# Altium PCB Interface.PcbDoc
Units mil, origin at the board's own origin, x right, y up, seen from the top; angles counter-clockwise.
Board outline 2450 x 1200 mil, 2 copper layers (Top Layer, Bottom Layer); 16 components, 30 nets, 55 pads, 0 vias.
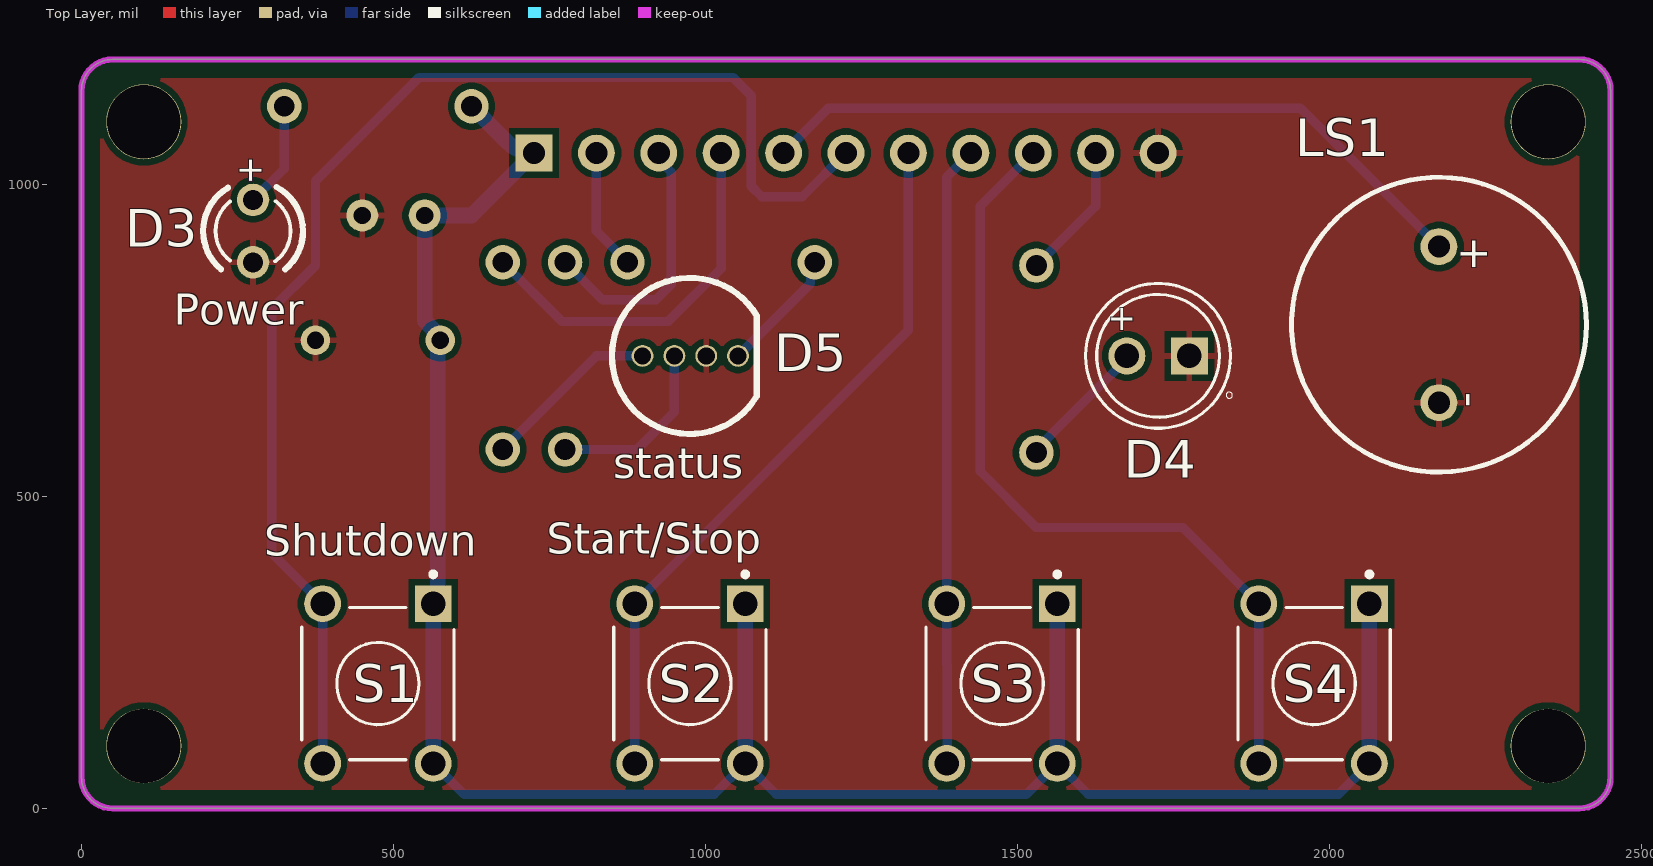
[diagram p0: Top Layer view]
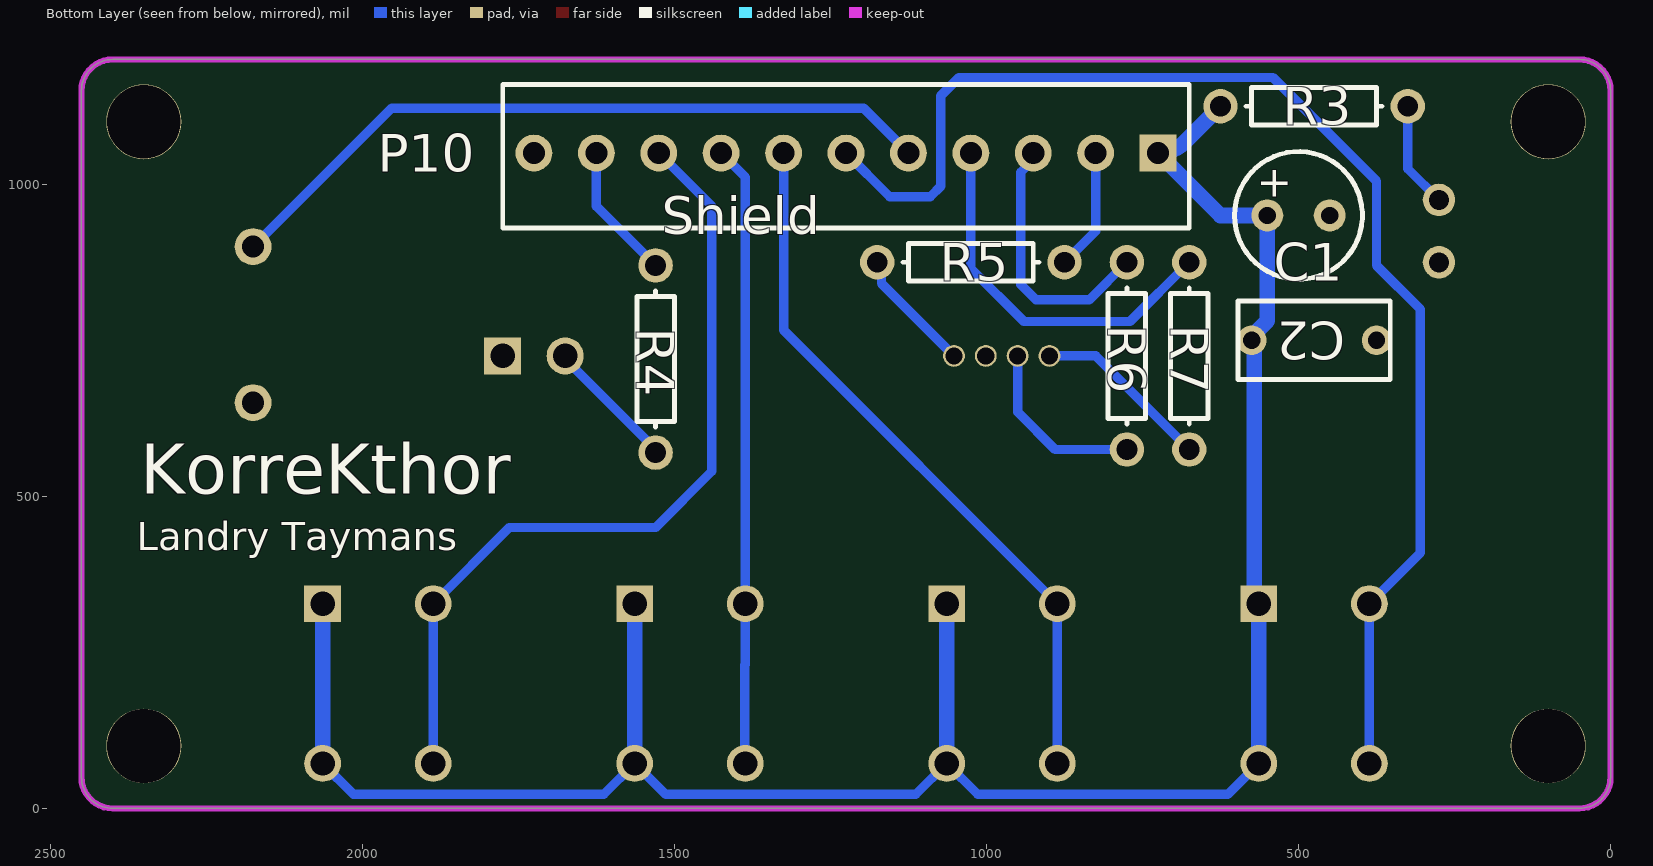
[diagram p1: Bottom Layer view, seen from below]

## Layer stack, top to bottom
Top Solder: solder mask 0.4, Solder Resist, Dk 3.5
Top Layer: signal copper 1.4
Dielectric 1: dielectric 12.6, FR-4, Dk 4.8
Bottom Layer: signal copper 1.4
Bottom Solder: solder mask 0.4, Solder Resist, Dk 3.5

## Board outline
0,50 0,1150 cw(c50,1150) 50,1200 2400,1200 cw(c2400,1150) 2450,1150 2450,50 cw(c2400,50) 2400,0 50,0 cw(c50,50)

## Design rules (kind name [scope] priority, off if disabled: settings)
Clearance [All] p1: gap=10 ignorepadtopadclearanceinfootprint=FALSE except(0: Arc-Hole Track-Hole SMDPad-Hole THPad-Hole Via-Hole Fill-Hole Poly-Hole Region-Hole Text-Hole)
PolygonConnect [All] p1: connectstyle=Relief reliefconductorwidth=10 reliefentries=4 polygonreliefangle="90 Angle" airgapwidth=10
RoutingVias [All] p1: holewidth=28 width=50 viastyle="Through Hole" minholewidth=28 minwidth=50 maxholewidth=28 maxwidth=50
SolderMaskExpansion [All] p1: expansion=4 istentingtop=FALSE
Width [All] p1: maxlimit=50 minlimit=10 preferedwidth=15
30 further rules are at their usual default settings.

## Components (designator, comment, footprint, x,y, rotation, side; value= is the part's Value field where it differs from the comment)
C1 "Cap Pol1" Rad5.2 500,950 r180 bottom value=10u
C2 "Cap" RAD-0.2 475,750 r180 bottom value=100n
D3 "Power" LED_3MM 275,925 r270 top
D4 "LED +" LED_5mm 1725,725 r180 top
D5 "status" "LED RGB" 975,725 r0 top
LS1 "Buzzer" Buzzer 2175,775 r270 top
P10 "Shield" Conn_1X11 725,1050 r0 bottom
R3 "Res1" AXIAL-0.3 475,1125 r180 bottom value=1k
R4 "Res1" AXIAL-0.3 1530,720 r270 bottom value=100
R5 "Res1" AXIAL-0.3 1025,875 r0 bottom value=100
R6 "Res1" AXIAL-0.3 775,725 r270 bottom value=100
R7 "Res1" AXIAL-0.3 675,725 r270 bottom value=100
S1 "Shutdown" SW_1825910-6-4 475,200 r270 top
S2 "Start/Stop" SW_1825910-6-4 975,200 r270 top
S3 "Button +" SW_1825910-6-4 1475,200 r270 top
S4 "Button ++" SW_1825910-6-4 1975,200 r270 top

## Footprints (in the part's own frame and the unit in brackets; to place one, negate y for a bottom-side part, rotate by r counter-clockwise, add the part's x,y. Pads: shape width x height; smd on the part's side, far side on the other; paste and mask are expansions set on the pad)
AXIAL-0.3 [mm] "Axial Device, Thru-Hole; 2 Leads; 0.3 in Pin Spacing"
  round 1.4 hole 0.85: 1(-3.81,0) 2(3.81,0)
  silkscreen extent -2.77,-0.76 2.77,0.76
Buzzer [mm] "Buzzer 10.2 (Dia.)"
  round 1.5 hole 0.9: 1(-3.175,0) 2(3.175,0)
  silkscreen extent -6,-6 6,6
Conn_1X11 [mm] "Connector; Header; 3 Position"
  rect 1.5x1.5 hole 0.9: 1(0,0)
  round 1.5 hole 0.9: 2(2.54,0) 3(5.08,0) 4(7.62,0) 5(10.16,0) 6(12.7,0) 7(15.24,0) 8(17.78,0) 9(20.32,0) 10(22.86,0) 11(25.4,0)
  silkscreen extent -1.27,-2.79 26.67,3.05
"LED RGB" [mil] "5mm RGB LED"
  round 35 hole 27.56: 1(77,0) 2(26,0) 3(-25,0) 4(-76,0)
  silkscreen extent -125,-125 107,125
LED_3MM [mil]
  round 52 hole 32: 1(-50,0) 2(50,0)
  silkscreen extent -71,-80 61,80
LED_5mm [mm]
  round 1.508 hole 1: 1(1.27,0)
  rect 1.508x1.508 hole 1: 2(-1.27,0)
  silkscreen extent -3.03,-2.95 2.95,2.95
Rad5.2 [mm] "Capacitor (Radial); 2 Leads; 5.2 (Dia.)"
  round 1.3 hole 0.7: 1(-1.27,0) 2(1.27,0)
  silkscreen extent -2.6,-2.6 2.6,2.6
RAD-0.2 [mm] "Radial Cap, Thru-Hole; 2 Leads; 0.2 in Pin Spacing"
  round 1.2 hole 0.7: 1(-2.54,0) 2(2.54,0)
  silkscreen extent -3.1,-1.6 3.1,1.6
SW_1825910-6-4 [mm]
  rect 1.498x1.498 hole 0.99: 1(-3.25,2.25)
  round 1.498 hole 0.99: 1(3.25,2.25) 2(-3.25,-2.25) 2(3.25,-2.25)
  silkscreen extent -4.54,-3.1 3.1,3.1

## Part data
C1: "Polarized Capacitor (Radial)", LatestRevisionDate=17-Jul-2002, LatestRevisionNote="Re-released for DXP Platform.", PackageDescription="Polarized Capacitor (Radial); 2 Leads", PackageReference=RB7.6-15, Published=8-Jun-2000, Publisher="Altium Limited"
C2: "Capacitor", LatestRevisionDate=17-Jul-2002, LatestRevisionNote="Re-released for DXP Platform.", PackageDescription="Radial Cap, Thru-Hole; 2 Leads; 0.3 in Pin Spacing", PackageReference=RAD-0.3, Published=8-Jun-2000, Publisher="Altium Limited"
D3 D4: library part LED0, "Typical INFRARED GaAs LED", LatestRevisionDate=08-Jul-2005, LatestRevisionNote="Mech Layer 1 removed.", PackageDescription="LED; 2 Leads", PackageReference=LED-0, Published=8-Jun-2000, Publisher="Altium Limited"
D5: library part LED_RGB, "Typical INFRARED GaAs LED", LatestRevisionDate=08-Jul-2005, LatestRevisionNote="Mech Layer 1 removed.", PackageDescription="LED; 2 Leads", PackageReference=LED-0, Published=8-Jun-2000, Publisher="Altium Limited"
LS1: "Magnetic Transducer Buzzer", ComponentLink1Description="Manufacturer Link", ComponentLink1URL=http://www.megastar.com/linecard/buzzmode/index.php, DatasheetVersion=17-Dec-2003, LatestRevisionDate=17-Dec-2003, LatestRevisionNote="Schematic revised, PCB Footprint replaced.", PackageDescription="Magnetic Transducer Buzzer", PackageReference=ABSM-1574, Published=24-Mar-1999, Publisher="Altium Limited"
P10: library part "Header 11", "Header, 11-Pin", LatestRevisionDate=17-Jul-2002, LatestRevisionNote="Re-released for DXP Platform.", Publisher="Altium Limited"
R3 R4 R5 R6 R7: "Resistor", LatestRevisionDate=17-Jul-2002, LatestRevisionNote="Re-released for DXP Platform.", PackageDescription="Axial Device, Thru-Hole; 2 Leads; 0.3 in Pin Spacing", PackageReference=AXIAL-0.3, Published=8-Jun-2000, Publisher="Altium Limited"
S1 S2 S3 S4: library part SW-PB, "Switch", LatestRevisionDate=17-Jul-2002, LatestRevisionNote="Re-released for DXP Platform.", PackageDescription="Switch; 2 Leads", PackageReference=SPST-2, Published=24-Mar-1999, Publisher="Altium Limited"

## Free pads (board coordinates)
  round 120 hole 118.11: 1(100,100) 1(100,1100) 1(2350,100) 1(2350,1100)

## Nets (pads, with @x,y where several pads share a name; then routed paths per layer and width w, separated by ;. In a path a pad name is that pad's centre, name@x,y a point inside that pad or via, vN(x,y) a via of type N, cw(c..) or ccw(c..) an arc to the next point about the centre after c; other vN are vias at no path point)
+3.3: C1.1 C2.1 P10.1 R3.1 S1.1 S2.1 S3.1 S4.1 | length 3628.8
  Bottom Layer w15: S1.1@563.58,72.05 613.13,22.5 1014.03,22.5 1063.58,72.05 1113.13,22.5 1514.03,22.5 1563.58,72.05 1613.13,22.5 2014.03,22.5 S4.1@2063.58,72.05
  Bottom Layer w25: S1.1@563.58,72.05 563.58,327.95 570.74,335.11 570.74,745.74 C2.1 575,756.02 550,781.02 C1.1 625,950 P10.1 cw(c725,1110.36) 682.32,1067.68 R3.1 ; S2.1@1063.58,72.05 S2.1@1063.58,327.95 ; S3.1@1563.58,72.05 S3.1@1563.58,327.95 ; S4.1@2063.58,72.05 S4.1@2063.58,327.95
+5: 
+24: 
GND: C1.2 C2.2 D3.2 D4.2 D5.2 LS1.2 P10.11
GPIO1: P10.2 R5.1 | length 195.7
  Bottom Layer w15: P10.2 825,925 R5.1
GPIO4: 
GPIO7: P10.3 R6.1 | length 423.8
  Bottom Layer w15: R6.1 835,815 920.61,815 945,839.39 945,1019.19 925,1039.19 P10.3
GPIO8: P10.4 R7.1 | length 609.6
  Bottom Layer w15: R7.1 770,780 940,780 1025,865 P10.4
GPIO12: LS1.1 P10.5 | length 1171.8
  Bottom Layer w15: P10.5 1197.03,1122.03 1952.97,1122.03 LS1.1
GPIO14: P10.6 S1.2 | length 2107.5
  Bottom Layer w15: S1.2@386.42,72.05 386.42,327.95 305,409.37 305,800 375,870 375,1005 541,1171 1044,1171 1073,1142 1073,997 1090,980 1155,980 P10.6
GPIO15: P10.7 S2.2 | length 1159.6
  Bottom Layer w15: S2.2@886.42,72.05 886.42,327.95 1325,766.53 P10.7
GPIO17: 
GPIO18: 
GPIO22: 
GPIO23: P10.8 S3.2 | length 994.4
  Bottom Layer w15: S3.2@1386.42,72.05 1387,72.63 1387,230 1386.42,230.58 1386.42,327.95 1386.42,1011.42 P10.8
GPIO24: P10.9 S4.2 | length 1335.4
  Bottom Layer w15: P10.9 1440,965 1440,540 1530,450 1764.37,450 1886.42,327.95 S4.2@1886.42,72.05
GPIO25: P10.10 R4.1 | length 219.4
  Bottom Layer w15: R4.1 1625,965 P10.10
GPIO27: 
NetD1_1: 
NetD2_1: 
NetD3_1: D3.1 R3.2 | length 170.7
  Bottom Layer w15: D3.1 325,1025 R3.2
NetD4_1: D4.1 R4.2 | length 215.1
  Bottom Layer w15: R4.2 1530,575 1675,720 D4.1
NetD5_1: D5.1 R5.2 | length 200.9
  Bottom Layer w15: D5.1 1168.1,841.1 1168.1,868.1 R5.2
NetD5_3: D5.3 R6.2 | length 289.9
  Bottom Layer w15: R6.2 890,575 950,635 D5.3
NetD5_4: D5.4 R7.2 | length 286.1
  Bottom Layer w15: R7.2 825,725 D5.4
NetQ1_2: 
NetQ2_2: 
Pompe: 
Valve: 
VCC: 

## Polygon pours and split planes (outlines as drawn)
GND on Top Layer "GND_plane" (solid, pour order 0): 2400,1170 2400,30 30,30 30,1170 60,1170

## Keep-outs
Keep-Out Layer:
  the board outline again, w10

## Silkscreen, mask and mechanical layers (free items; w line width, h text height)
Bottom Overlay:
  text "KorreKthor" at 2356,504 h80
  text "Landry Taymans" at 2361,414 h45

## Dimensions
1685,1165 to 1685,925 on Top Paste
2400,1200 to 1780,1165 on Top Paste
0,1150 to 645,1160 on Top Paste
645,1160 to 1805,1160 on Top Paste
2180,770 to 2450,1150 on Top Paste
2180,770 to 2400,1200 on Top Paste
2400,0 to 1975,200 on Top Paste
1975,134.06 to 2450,10 on Top Paste
1720,725 to 2450,1150 on Top Paste
1775,725 to 2400,1200 on Top Paste
1001,725 to 50,1200 on Top Paste
975,715 to 0,1150 on Top Paste
280,925 to 0,1150 on Top Paste
300,925 to 50,1200 on Top Paste
340,75 to 445,325 on Top Paste
50,0 to 425,75 on Top Paste
2100,155 to 2450,50 on Top Paste
601.96,119.94 to 851.96,124.94 on Top Paste
350,-105 to 600,150 on Top Paste
0,50 to 350,140 on Top Paste
100,1100 to 100,100 on Top Paste
100,1100 to 2350,1100 on Top Paste
2400,0 to 2400,1200 on Top Paste
0,50 to 2450,50 on Top Paste

## Text inside footprints (layer, text, board x,y; h text height)
C1: Bottom Overlay "+" at 567,979.67 h50
D3: Top Overlay "+" at 253.34,1045 h40 r270
D4: Top Overlay "+" at 1690,801.66 h40 r180
LS1: Top Overlay "-" at 2203.01,667 h50 r270; Top Overlay "+" at 2209.67,917 h50 r270